# Altium PCB DAQ_REV_B.PcbDoc (part 2 of 2)
Units mil, origin at the board's own origin, x right, y up, seen from the top; angles counter-clockwise.
Board outline 2228.79 x 3254.41 mil, 2 copper layers (Top Layer, Bottom Layer), stack 63.824 mil thick; 159 components, 100 nets, 487 pads, 285 vias.
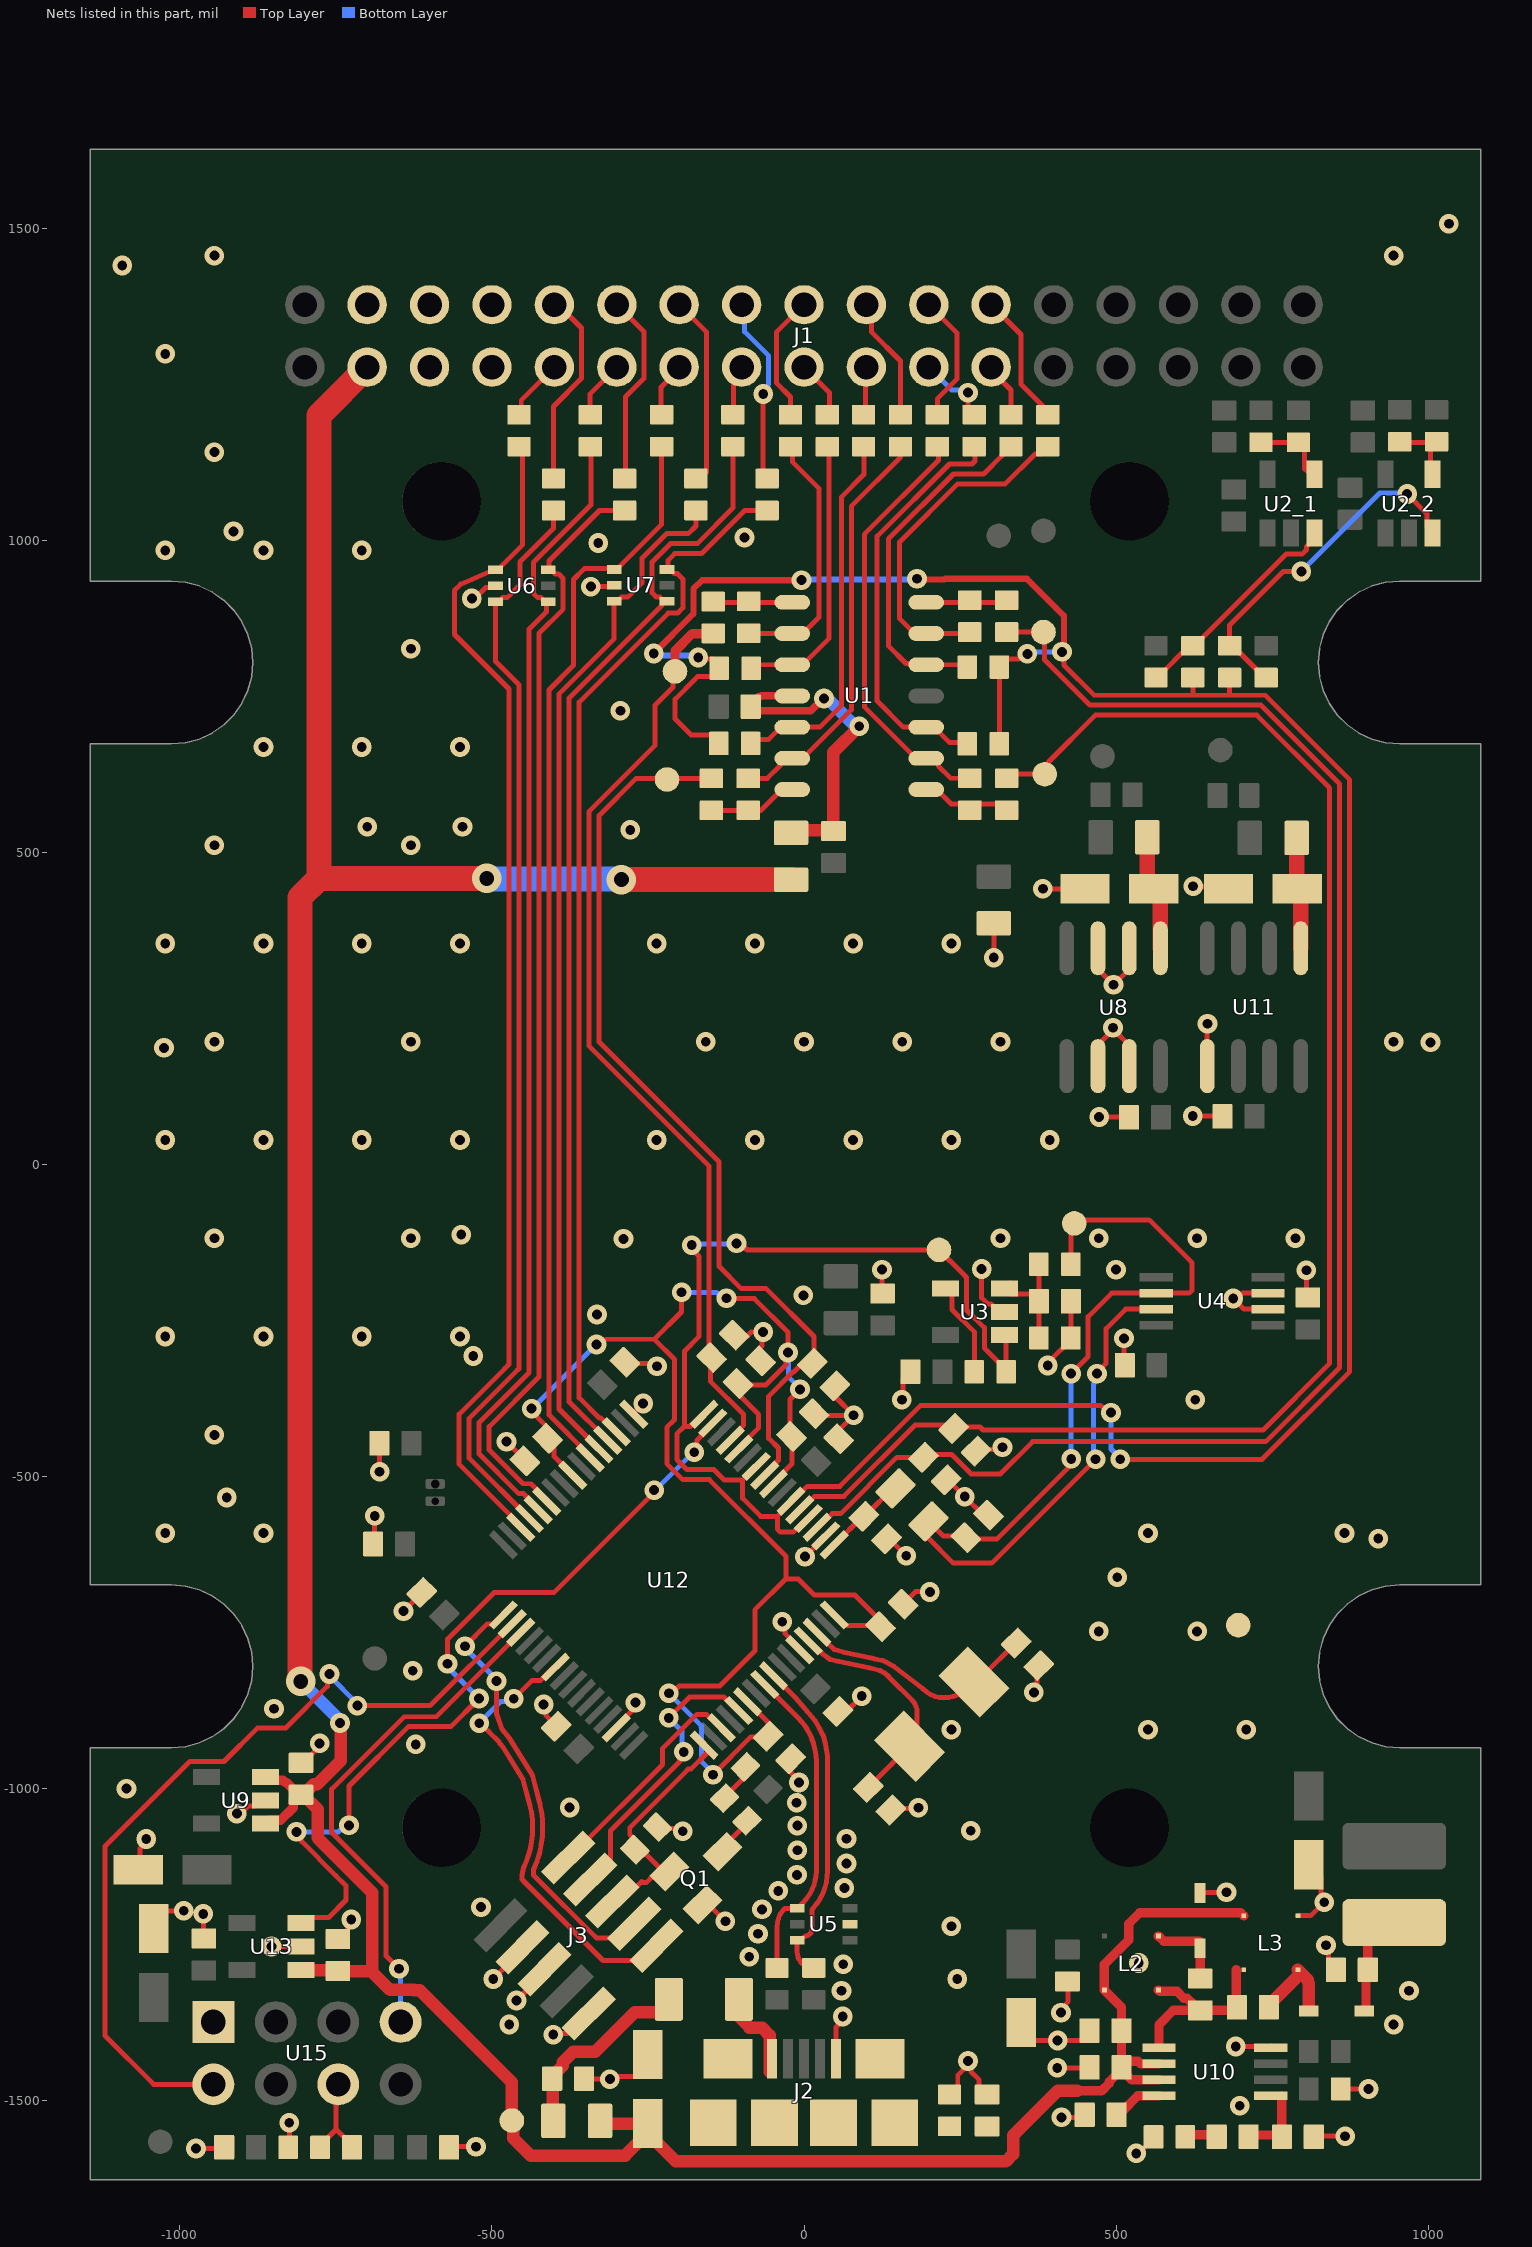
[diagram p2: the nets of this part, all layers, seen from the top]

## Via types
v1: diameter 31.5, hole 15.75, Top Layer to Bottom Layer, 242 vias
v2: diameter 31.5, hole 15.75, Top Layer to Bottom Layer, tented both sides, 40 vias
v3: diameter 47.24, hole 23.62, Top Layer to Bottom Layer, 3 vias

## Nets (pads, with @x,y where several pads share a name; then routed paths per layer and width w, separated by ;. In a path a pad name is that pad's centre, name@x,y a point inside that pad or via, vN(x,y) a via of type N, cw(c..) or ccw(c..) an arc to the next point about the centre after c; other vN are vias at no path point) (continued)
GND: C4.2 C5.2 C6.2 C7.2 C8.1 C9.2 C10.2 C11.2 C12.2 C13.1 C14.2 C15.1 C16.2 C18.2 C19.1 C20.2 C21.2 C24.2 C25.2 C26.2 C27.2 C28.2 C29.2 C31.2 C32.2 C33.1 C35.2 C36.2 C37.2 C38.2 C39.2 C40.2 C41.2 C42.2 C44.2 C45.2 C46.2 C47.2 C48.2 C49.2 C50.2 C51.2 C52.2 C53.2 C54.1 C55.1 C57.2 D2.2 FB4.1 J1.4 J1.5 J1.6 J1.7 J1.8 J2.5 J3.3 J3.5 J3.9 L3.4 Q1.2 R31.1 R42.1 R44.1 R45.1 R52.1 R54.1 TP14.1 U3.2 U4.2 U4.3 U6.2 U7.2 U8.2 U8.3 U8.6 U8.7 U9.2 U10.4 U11.5 U12.2 U12.17 U12.46 U12.60 U13.2 U15.1 | length 4146.4
  Top Layer w8: C27.2@-1099.14,-1137.13 -1090.81,-1137.13 -1063.98,-1110.3 -1063.98,-1096.25 -1054.13,-1086.41 v1(-1054.13,-1080.71) ; C39.2@-1045.28,-1193.9 -1043.31,-1195.87 v1(-994.09,-1195.87) ; v1(-974.41,-1576.77) -931.1,-1576.77 C55.1@-929.13,-1574.8 ; v1(-962.6,-1200.79) -962.6,-1239.17 C41.2@-961.61,-1240.16 ; v2(-908.78,-1040.04) -902.42,-1040.04 -889.88,-1027.5 -880.84,-1027.5 -872.05,-1018.7 U9.2@-854.33,-1018.7 ; v2(-853.35,-1252.95) U13.2@-806.1,-1252.95 ; R52.1@-826.77,-1574.8 -824.8,-1572.84 v1(-824.8,-1535.43) ; C28.2@-799.51,-955.61 -776.27,-932.37 v1(-776.27,-927.47) ; C40.2@-747.05,-1241.14 -743.5,-1241.14 -731.36,-1229 -731.36,-1221.69 -725.68,-1216 v1(-725.68,-1209.65) ; C51.2@-690.47,-608.01 -687.99,-605.53 v2(-687.99,-562.99) ; C52.2@-680.4,-446.55 -680.12,-446.83 v2(-680.12,-492.13) ; v1(-641.73,-715.55) -612.58,-686.4 C35.2@-612.58,-685.64 ; C54.1@-568.9,-1574.8 -567.91,-1573.82 v1(-525.59,-1573.82) ; v1(-532.29,907.29) -527.7,907.29 -510.37,924.61 -502.31,924.61 -499.42,927.5 U6.2@-494.5,927.5 ; v1(-498.03,-1305.12) -441.92,-1249.01 J3.3@-441.16,-1249.01 ; v1(-476.78,-443.9) -447.23,-473.45 C48.2@-447.23,-474.79 ; v1(-460.63,-1339.57) -405.81,-1284.74 J3.5@-405.81,-1284.36 ; v1(-417.32,-865.16) -413.23,-869.25 -413.23,-883.04 -397.03,-899.25 C36.2@-397.03,-900.21 ; v1(-401.97,-1394.29) -399.76,-1392.09 -379.18,-1392.09 J3.9@-338.63,-1351.54 ; C57.2@-351.38,-1456.77 -342.6,-1465.55 v1(-311.02,-1465.55) -307.01,-1461.54 -270.25,-1461.54 -250.63,-1441.91 C21.2@-250.63,-1426.17 ; v1(-341.5,926.22) -306.06,926.22 U7.2@-304.13,928.15 ; U12.46@-300.75,-902.68 -300.75,-900.16 -274.59,-874 -274.59,-866.69 v2(-270.09,-862.2) ; C38.2@-287.02,-316.55 -284.52,-319.06 -239.88,-319.06 v1(-235.68,-323.26) ; U12.17@-272.91,-400.19 -272.91,-397.91 v2(-257.87,-382.87) ; R54.1@-230.49,-1063.72 -205.25,-1063.72 -200.69,-1068.28 v1(-194.33,-1068.28) ; Q1.2@-159.7,-1186.75 -151.83,-1186.75 v1(-125.98,-1212.6) ; C5.2@-111.83,-273.24 -109.32,-275.75 -92.15,-275.75 -84.68,-268.28 -65.52,-268.28 v1(-65.45,-268.21) ; C44.2@-69.5,-314.58 -72.01,-312.08 -72.01,-294.91 -67,-289.9 -67,-273.16 v1@-63.75,-269.91 ; v2(-34.79,-732.69) -30.3,-737.18 -30.3,-751.64 -7.05,-774.89 U12.60@-7.05,-777.41 ; C46.2@-21.28,-952.15 -23.78,-954.66 -23.78,-971.83 -8.06,-987.54 v1(-8.06,-990.1) ; v2(1.55,-628.23) U12.2@34.71,-595.06 ; C47.2@16.13,-399.23 18.63,-401.73 v1(79.57,-401.73) ; C7.2@49.59,-371.76 v1(79.57,-401.73) ; J2.5@51.18,-1433.07 51.18,-1382.34 62.01,-1371.52 v1(62.01,-1365.16) ; C37.2@54.51,-876.36 68.06,-876.36 v1(92.62,-851.8) ; C42.2@55.5,-439.58 55.5,-425.8 v1(79.57,-401.73) ; v1(125,-168.31) 125,-205.71 C26.2@125.98,-206.69 ; C53.2@132.27,-599.79 136.71,-599.79 v1(163.77,-626.84) ; C50.2@139.22,-1034.34 156.39,-1034.34 158.9,-1031.83 182.3,-1031.83 v1(183.34,-1030.79) ; v1(156.82,-376.79) 158.41,-375.2 158.41,-344.13 C8.1@170.52,-332.02 ; C45.2@158.84,-704.35 178.74,-684.45 201.18,-684.45 v1(201.77,-685.04) ; C6.2@229.71,-503.33 229.71,-504.18 v1(257.62,-532.08) 287.16,-561.63 C12.2@295.65,-561.63 ; R42.1@233.27,-1490.16 234.64,-1490.16 246.39,-1478.41 246.39,-1459.34 262.8,-1442.94 v1(262.8,-1436.58) 267.29,-1441.08 267.29,-1453.31 280.79,-1466.82 280.79,-1478.02 C13.1@292.94,-1490.16 ; C4.2@275.97,-459.04 278.47,-456.53 314.49,-456.53 v1(318.06,-452.96) ; v2(284.66,-167.3) 284.66,-213.39 294.63,-223.35 299.79,-223.35 312.39,-235.96 U3.2@321.25,-235.96 ; C13.1@290.97,-1500 C13.1@291.34,-1500 ; v1(304.13,331.69) FB4.1@304.13,386.81 ; C19.1@348.43,-1375 348.43,-1383.92 368.05,-1403.54 v1(406.5,-1403.54) C20.2@454.72,-1403.54 ; v1(368.38,-845.75) 368.38,-839.39 373.74,-834.03 373.74,-805.37 C49.2@376.25,-802.86 ; v1(382.87,441.93) C16.2@439.05,441.93 ; v1(390.75,-321.85) 390.75,-317.73 428.15,-280.33 428.15,-219.44 C9.2@427.59,-218.88 ; v1(405.86,-1447.49) 457.04,-1447.49 C15.1@457.68,-1446.85 ; v1(411.92,-1359.01) 411.92,-1352.65 423.23,-1341.35 423.23,-1309.96 C18.2@422.24,-1308.98 ; v1(412.64,-1526.82) 445.62,-1526.82 C29.2@449.8,-1522.64 ; U8.6@471.14,157.72 471.14,192.26 495.06,216.18 v2@495.06,217.26 ; U8.3@471.14,346.69 471.14,313.13 v2(496.04,288.23) v2@496.04,288.13 ; v1(472.93,76.2) 520.18,76.2 C14.2@520.67,75.71 ; v2(495.06,219.23) v2@495.06,217.26 ; v2@496.04,286.16 v2@496.04,288.13 ; v1(512.8,-278.54) 512.8,-319.84 C11.2@514.2,-321.24 ; U8.7@521.14,157.72 521.14,191.18 v2@495.06,217.26 ; U8.2@521.14,346.69 521.14,313.23 v2@496.04,288.13 ; v1(532.42,-1584.58) 536.48,-1584.58 560.04,-1561.02 R45.1@560.04,-1558.07 ; v1(622.91,77.8) 670.16,77.8 C32.2@670.65,77.31 ; v1(623.63,445.94) C33.1@671.42,445.94 ; D2.2@634.84,-1167.32 636.02,-1166.14 v1(677.17,-1166.14) ; U11.5@645.65,155.26 646.09,155.7 646.09,225.19 v2(646.54,225.63) ; v2(691.93,-1413.39) 692.42,-1412.89 747.54,-1412.89 U10.4@748.03,-1412.4 ; U4.2@743.53,-231.68 705.1,-231.68 v2(687.99,-214.57) 694.35,-214.57 702.83,-206.09 U4.3@743.53,-206.09 ; L3.4@791.34,-1203.74 812.01,-1203.74 v1(833.66,-1182.09) 833.66,-1175.73 828.68,-1170.74 828.68,-1141.67 C24.2@809.05,-1122.05 ; v1(805.12,-169.29) 805.12,-210.59 C10.2@807.51,-212.98 ; C31.2@816.93,-1558.07 817.91,-1557.09 v1(867.13,-1557.09) ; v1(836.61,-1250.98) 840.22,-1254.59 840.22,-1274.67 852.36,-1286.81 C25.2@852.36,-1290.35 ; R44.1@859.25,-1481.3 v1(904.53,-1481.3)
  other v1: -472.44,-1377.95 944.88,-1377.95 60.04,-1323.82 969.49,-1323.82 245.45,-1305.22 62.99,-1281.5 -87.76,-1269.35 -73.61,-1232.48 236.22,-1220.47 -67.39,-1193.47 -41.29,-1163.84 64.7,-1159.32 -11.21,-1138.23 67.98,-1119.96 -10.61,-1098.74 67.98,-1080.46 267.22,-1067.42 -10.61,-1059.25 -375.59,-1030.25 -11.81,-1022.64 -1085.63,-1000 551.18,-905.51 708.66,-905.51 -849.41,-872.05 -626.97,-811.02 472.44,-748.03 629.92,-748.03 501.97,-661.42 920.28,-599.41 -1023.62,-590.55 -866.14,-590.55 551.18,-590.55 866.14,-590.55 -925.2,-533.46 -944.88,-433.07 626.97,-376.97 -530.08,-306.61 -1023.62,-275.59 -866.14,-275.59 -708.66,-275.59 -551.18,-275.59 -331.69,-240.16 -0.98,-209.65 500,-168.31 -289.37,-119.09 -944.88,-118.11 -629.92,-118.11 314.96,-118.11 472.44,-118.11 629.92,-118.11 787.4,-118.11 -549.21,-112.2 -1023.62,39.37 -866.14,39.37 -708.66,39.37 -551.18,39.37 -236.22,39.37 -78.74,39.37 78.74,39.37 236.22,39.37 393.7,39.37 -1025.59,187.01 1003.94,195.87 -944.88,196.85 -629.92,196.85 -157.48,196.85 0,196.85 157.48,196.85 314.96,196.85 944.88,196.85 -1023.62,354.33 -866.14,354.33 -708.66,354.33 -551.18,354.33 -236.22,354.33 -78.74,354.33 78.74,354.33 236.22,354.33 -944.88,511.81 -629.92,511.81 -278.54,536.42 -699.8,541.34 -547.24,541.34 -866.14,669.29 -708.66,669.29 -551.18,669.29 -294.29,727.36 -629.92,826.77 -1023.62,984.25 -866.14,984.25 -708.66,984.25 -329.72,996.06 -95.47,1004.92 -914.37,1014.76 -944.88,1141.73 -1023.62,1299.21 -1092.52,1440.94 -944.88,1456.69 944.88,1456.69 1033.46,1507.87
  other v2: 698.33,-1508.37 536.42,-1279.53 -517.72,-1189.96 -622.05,-929.13 236.22,-905.51
IN1_N: J1.23 R19.1 | length 89.3
  Top Layer w8: J1.23@300,1277.95 300,1272.97 331.69,1241.28 R19.1@331.69,1201.77
IN1_P: J1.24 R15.1 | length 219.2
  Top Layer w8: J1.24@300,1377.95 347.71,1330.24 347.71,1250.71 396.65,1201.77 R15.1@399.61,1201.77
IN2_N: J1.21 R4.1 | length 119.1
  Top Layer w8: v1(262.77,1237.14) 262.77,1211.64 R4.1@272.64,1201.77
  Bottom Layer w8: J1.21@200,1277.95 236.32,1241.63 258.27,1241.63 v1(262.77,1237.14)
IN2_P: J1.22 R2.1 | length 208.2
  Top Layer w8: J1.22@200,1377.95 245.5,1332.46 245.5,1259.11 213.58,1227.2 R2.1@213.58,1201.77
IN3_N: J1.19 R24.1 | length 82.7
  Top Layer w8: R24.1@98.43,1195.87 98.43,1276.38 J1.19@100,1277.95
IN3_P: J1.20 R21.1 | length 198.8
  Top Layer w8: J1.20@100,1377.95 107.84,1370.12 107.84,1334.46 154.53,1287.77 R21.1@154.53,1201.77
IN4_N: J1.17 R10.1 | length 95.1
  Top Layer w8: J1.17@0,1277.95 40.53,1237.42 R10.1@40.53,1199.63
IN4_P: J1.18 R7.1 | length 203.9
  Top Layer w8: R7.1@-21.65,1201.77 -21.65,1230.24 -44.29,1252.88 -44.29,1333.66 J1.18@0,1377.95
JTAG_RST: J3.10 U12.39 | length 715.7
  Top Layer w8: v1(-520.56,-895.18) -505.07,-908.63 -488.81,-924.89 -486.99,-928.23 cw(c-634.13,-1062.76) -482.25,-933.6 -450.71,-984.62 -439.89,-1024.39 cw(c-580.75,-1062.76) -434.76,-1062.76 cw(c-580.75,-1062.76) -449.58,-1126.86 -451.77,-1139.05 -451.77,-1145.68 -449.43,-1148.02 -321.99,-1275.46 -273.88,-1275.46 J3.10@-236.45,-1251.74 ; v1(-465.06,-855.86) -436.19,-826.99 -422.45,-826.99 -400.7,-805.24 U12.39@-398.18,-805.24
  Bottom Layer w8: v1(-520.56,-895.18) -520.56,-894.75 -486.17,-860.36 -469.56,-860.36 v1(-465.06,-855.86)
JTAG_TCK: J3.4 U12.53 | length 453.5
  Top Layer w8: J3.4@-333.43,-1136.74 -310.32,-1113.63 -310.32,-1067.95 -199.79,-957.42 -199.79,-954.46 -192.83,-947.5 v2(-192.83,-941.14) ; v2(-216.83,-886.66) -183.27,-853.1 -128.74,-853.1 -107,-874.84 U12.53@-104.48,-874.84
  Bottom Layer w8: v2(-216.83,-886.66) -195.8,-907.69 -195.8,-938.17 v2(-192.83,-941.14)
JTAG_TDI: J3.8 U12.33 | length 704.3
  Top Layer w8: v1(-543.29,-771.92) -507.37,-736 -500.75,-736 -499.71,-737.04 -484.39,-721.73 U12.33@-481.7,-721.73 ; v1(-492.81,-827.76) -492.81,-878.32 -492.81,-879.33 -483.47,-905.73 -472.84,-918.23 -472.48,-918.95 -436.39,-976.31 -434.71,-980.07 -423.89,-1022.23 -423.44,-1024.08 cw(c-580.75,-1062.76) -418.76,-1062.7 cw(c-434.76,-1062.76) -418.76,-1062.76 cw(c-580.75,-1062.76) -433.41,-1130.09 -433.58,-1130.49 -433.58,-1138.39 -431.24,-1140.73 -335.24,-1236.73 -334.94,-1236.73 -332.26,-1239.41 -294.69,-1239.41 J3.8@-271.58,-1216.31
  Bottom Layer w8: v1(-543.29,-771.92) -543.29,-774.6 -492.81,-825.08 v1(-492.81,-827.76)
JTAG_TDO: J3.6 Q1.1 R54.2 U12.49 | length 396.2
  Top Layer w8: J3.6@-298.08,-1172.09 -283.13,-1172.09 -260.03,-1148.99 -258.86,-1150.15 -252.23,-1150.15 -242.07,-1139.99 -222.67,-1139.99 Q1.1@-215.71,-1133.03 ; R54.2@-274.67,-1093.41 -273.35,-1092.09 -273.35,-1079.33 -279.25,-1073.43 -279.25,-1062.6 -185.53,-968.89 -181.34,-968.89 -152.91,-940.46 -152.91,-937.77 U12.49@-160.16,-930.52 ; R54.2@-273.92,-1092.66 R54.2@-267.94,-1098.65 ; R54.2@-266.79,-1101.28 -265.71,-1102.36 -255.91,-1102.36 -224.41,-1133.86 Q1.1@-215.71,-1133.86
JTAG_TMS: J3.2 U12.51 | length 352
  Top Layer w8: J3.2@-368.79,-1101.38 -366.38,-1101.38 -226.62,-961.62 -226.62,-955.96 -226.43,-955.77 -226.43,-935.5 -171.87,-880.94 -156.58,-880.94 -150.24,-887.28 -147.72,-887.28 U12.51@-132.32,-902.68
NetC9_1: C9.1 R30.1 R31.2 U3.3 | length 194.1
  Top Layer w8: U3.3@330.05,-189.76 U3.3@321.25,-198.56 330.05,-207.35 364.88,-207.35 C9.1@376.41,-218.88 ; R31.2@376.41,-277.94 C9.1@376.41,-218.88 ; R30.1@376.41,-159.83 C9.1@376.41,-218.88
NetC16_1: C16.1 FB5.1 U8.1 | length 191.4
  Top Layer w15: C16.1@550.2,443.62 C16.1@551.65,442.17
  Top Layer w25: C16.1@550.2,443.62 FB5.1@550.2,524.53 ; C16.1@551.65,442.17 560.02,442.17 571.14,431.04 U8.1@571.14,346.69
NetC22_2: C22.2 D2.1 L2.3 | length 129.1
  Top Layer w15: L2.3@567.91,-1236.22 576.4,-1244.7 633.48,-1244.7 634.84,-1246.06 C22.2@634.84,-1304.13
NetC23_2: C23.2 D1.1 L3.3 | length 145
  Top Layer w20: C23.2@745.08,-1350.39 745.08,-1346.85 794.68,-1297.24 ; L3.3@791.34,-1290.35 807.66,-1306.68 807.66,-1310.22 809.06,-1311.61 D1.1@809.06,-1354.33
NetC25_1: C25.1 D1.2 L5.1 | length 169.7
  Top Layer w15: D1.2@897.64,-1356.3 899.23,-1356.3 900.59,-1354.94 900.59,-1293.31 C25.1@903.54,-1290.35 903.54,-1244.69 933.47,-1214.76 L5.1@945.87,-1214.76
NetC29_1: C29.1 U10.8 | length 74.3
  Top Layer w15: C29.1@508.86,-1521.65 508.86,-1518.11 534.84,-1492.13 U10.8@568.9,-1492.13
NetC30_1: C30.1 C31.1 U10.1 | length 115.2
  Top Layer w15: C30.1@712.6,-1555.12 765.75,-1555.12 U10.1@765.75,-1493.11
NetC30_2: C30.2 R45.2 | length 52.6
  Top Layer w15: R45.2@609.25,-1554.13 609.74,-1554.63 660.92,-1554.63 C30.2@661.42,-1555.12
NetC33_2: C33.2 FB6.1 U11.1 | length 177.6
  Top Layer w25: FB6.1@789.37,523.54 789.37,444.02 C33.2@791.22,442.17 ; U11.1@796.14,346.7 C33.2@796.14,442.17
NetC44_1: C44.1 C45.1 C46.1 C47.1 C48.1 U12.8 U12.12 U12.24 U12.54 U12.64 | length 2589.3
  Top Layer w8: v1(-436.46,-391.06) -436.46,-395.94 -400.26,-432.14 -400.26,-467.71 U12.24@-370.35,-497.63 U12.24@-369.82,-497.63 ; v1(-332.49,-288.31) -326.13,-288.31 -317.71,-279.89 -239.81,-279.89 ; v2(-216.58,-847.16) -211.67,-847.16 -200.14,-835.63 -134.84,-835.63 -78.74,-779.53 -78.74,-713.59 -28.78,-663.63 -28.78,-627.72 -151.6,-504.9 -194.1,-504.9 -219.73,-479.27 -219.73,-421.03 -207.3,-408.61 -207.3,-312.39 -239.81,-279.89 ; v1(-196.18,-204.63) -196.18,-236.25 -239.81,-279.89 ; v1(-145.75,-977.91) -145.75,-977.8 -85.09,-917.14 -78.47,-917.14 -77.14,-918.47 -74.64,-915.96 C46.1@-57.47,-915.96 ; v1(-124.27,-214.2) -123.59,-214.88 -79.54,-214.88 -25.59,-268.83 v1(-25.59,-301.1) -28.93,-304.44 -28.93,-321 -61.22,-353.28 -103.19,-353.28 C44.1@-105.69,-350.77 ; C44.1@-109.63,-363.67 -72.73,-400.57 -72.73,-421.59 -104.48,-453.35 U12.12@-104.48,-455.87 ; U12.54@-90.56,-858.41 U12.54@-90.56,-860.92 -57.47,-894.02 -57.47,-900.67 -54.96,-903.17 C46.1@-54.96,-915.96 ; U12.8@-48.81,-511.54 -48.81,-509.03 -19.15,-479.37 -19.15,-446.08 -22.57,-442.66 -22.57,-376.56 v1(-6.29,-360.22) v1(-6.29,-360.22) ; -26.21,-664.27 -8.83,-664.27 16.86,-689.96 81.82,-689.96 C45.1@127.52,-735.66 ; U12.64@48.63,-721.73 63.94,-737.04 66.64,-737.04 68.01,-738.41 102.6,-738.41 102.98,-738.03 103.35,-738.41 C45.1@118.88,-738.41
  Bottom Layer w8: v1(-436.46,-391.06) -435.85,-391.06 -333.1,-288.31 v1(-332.49,-288.31) ; v2(-216.58,-847.16) -164.49,-899.25 -164.49,-956.19 -145.75,-974.93 v1(-145.75,-977.91) ; v1(-196.18,-204.63) -140.19,-204.63 -130.63,-214.2 v1(-124.27,-214.2) ; v1@-25.14,-300.65 -25.14,-339.83 -6.29,-358.68 v1(-6.29,-360.22)
NetC49_1: C49.1 U12.62 Y2.1 | length 499.2
  Top Layer w8: U12.62@20.79,-749.57 37.45,-766.23 48,-776.77 65.16,-781.67 107.7,-790.9 107.94,-790.9 113.94,-792.25 125.95,-795.06 128.06,-795.89 130.69,-796.94 139.1,-801.6 145.03,-805.01 188.98,-838.58 190.81,-840.42 ccw(c224.41,-806.81) 224.41,-854.33 ; Y2.1@272.24,-829.12 295.3,-810.51 328.51,-777.31 C49.1@340.06,-766.67 ; 224.41,-854.33 ccw(c224.41,-799.73) Y2.1@263.02,-838.34 ; 224.41,-854.33 ccw(c224.41,-799.73) Y2.1@263.02,-838.34 ; 224.41,-854.33 ccw(c224.41,-799.73) Y2.1@263.02,-838.34 ; 224.41,-854.33 ccw(c224.41,-799.73) Y2.1@263.02,-838.34
NetC50_1: C50.1 U12.61 Y2.2 | length 466.2
  Top Layer w8: U12.61@6.87,-763.49 24.79,-778.89 31.13,-785.23 41.37,-792.77 52.43,-795.28 105.98,-806.9 119.91,-810.35 122.2,-811.06 129.63,-814.76 cw(c-919.92,-1884.02) 139.53,-824.57 173.23,-858.27 cw(c154.22,-877.28) 181.1,-877.28 Y2.2@181.1,-903.47 ; C50.1@103.03,-998.15 114.18,-987.12 148.37,-952.93 Y2.2@169.24,-932.12 ; Y2.2@169.24,-932.12 ccw(c140.59,-903.47) Y2.2@181.1,-903.47 ; Y2.2@169.24,-932.12 ccw(c140.59,-903.47) Y2.2@181.1,-903.47 ; Y2.2@169.24,-932.12 ccw(c140.59,-903.47) Y2.2@181.1,-903.47 ; Y2.2@169.24,-932.12 ccw(c140.59,-903.47) Y2.2@181.1,-903.47
NetC53_1: C53.1 FB2.1 U12.1 | length 137.3
  Top Layer w8: U12.1@48.63,-608.98 95.37,-562.24 97.67,-562.24 98.44,-562.24 143.85,-516.83 FB2.1@147.73,-516.83
NetC56_1: C56.1 R52.2 U15.6 | length 152.6
  Top Layer w8: R52.2@-775.59,-1574.8 -775.59,-1571.85 -750,-1546.26 -750,-1545.67 ; U15.6@-746.46,-1474.02 -750,-1477.56 -750,-1545.67 ; C56.1@-724.41,-1574.8 -724.41,-1571.26 -750,-1545.67
NetC57_1: C57.1 F1.2 FB1.1 | length 315
  Top Layer w20: C57.1@-403.54,-1464.65 -402.56,-1465.63 -402.56,-1531.5 FB1.1@-401.58,-1532.48 ; C57.1@-403.54,-1461.1 -386.51,-1444.06 -386.51,-1438.45 -370.07,-1422.01 -364.45,-1422.01 -364.4,-1421.96 -334.87,-1421.96 -271.57,-1358.65 -229.17,-1358.65 -216.54,-1346.01 F1.2@-216.54,-1337.6
NetD3_1: D3.1 R53.2 | length 62.4
  Top Layer w8: R53.2@-134.84,-1023.62 R53.2@-134.84,-1019.31 ; R53.2@-125.69,-1012.12 D3.1@-87.68,-974.11 ; D3.1@-94.87,-982.28 D3.1@-94.87,-977.97
NetJ1_9: J1.9 R32.2 | length 99.7
  Top Layer w8: R32.2@-456.69,1201.77 -453.12,1205.35 -453.12,1224.83 J1.9@-400,1277.95
NetJ1_10: J1.10 R33.1 | length 318.9
  Top Layer w8: R33.1@-401.51,1099.41 -401.51,1214.93 -356.5,1259.94 -356.5,1340.76 -393.7,1377.95 J1.10@-400,1377.95
NetJ1_11: J1.11 R34.2 | length 92.9
  Top Layer w8: R34.2@-342.8,1202.76 -342.8,1235.15 J1.11@-300,1277.95
NetJ1_12: J1.12 R35.1 | length 308.9
  Top Layer w8: J1.12@-300,1377.95 -256.5,1334.46 -256.5,1259.94 -286.42,1230.02 R35.1@-286.42,1099.41
NetJ1_13: J1.13 R36.2 | length 87.3
  Top Layer w8: R36.2@-229.3,1202.76 -229.3,1245.74 -200,1275.04 J1.13@-200,1277.95
NetJ1_14: J1.14 R37.1 | length 305.4
  Top Layer w8: J1.14@-200,1377.95 -156.5,1334.46 -156.5,1109.19 -168.25,1097.44 R37.1@-170.28,1097.44
NetJ1_15: J1.15 R38.2 | length 80.6
  Top Layer w8: R38.2@-113.09,1202.76 -113.09,1249.98 -100,1263.07 J1.15@-100,1277.95
NetJ1_16: J1.16 R39.1 | length 312.7
  Top Layer w8: v1(-65.41,1234.88) -65.41,1095.92 R39.1@-59.06,1089.57
  Bottom Layer w8: J1.16@-100,1377.95 -94.99,1372.94 -94.99,1334.46 -56.5,1295.97 -56.5,1250.14 -65.41,1241.23 v1(-65.41,1234.88)
NetQ1_3: Q1.3 R53.1 | length 65.5
  Top Layer w8: Q1.3@-137.99,-1109.19 -137.99,-1102.1 R53.1@-96.68,-1060.8
NetR1_1: R1.1 R2.2 U1.9 | length 691.9
  Top Layer w8: R2.2@228.43,1150.59 227.31,1150.59 215.57,1138.84 215.57,1128.95 96.59,1009.98 96.59,733.5 179.07,651.02 U1.9@195.8,651.02 208.31,651.02 215.52,643.81 215.52,638.59 234.98,619.13 R1.1@265.68,619.13
NetR1_2: R1.2 R3.1 U1.8 | length 142.6
  Top Layer w8: U1.8@195.8,601.02 212.53,601.02 235.43,578.12 265.68,578.12 314.56,578.12 R3.1@324.74,567.95
NetR4_2: R4.2 R6.2 U1.10 | length 663.8
  Top Layer w8: U1.10@195.8,701.02 159.21,701.02 117.26,742.98 117.26,1007.03 233.07,1122.84 269.36,1122.84 274.05,1127.53 274.05,1139.15 R4.2@285.49,1150.59 ; U1.10@208.57,701.02 233.38,676.22 R6.2@267.65,676.22
NetR5_1: R5.1 R7.2 U1.2 | length 413.1
  Top Layer w8: R5.1@-88.65,844.53 R5.1@-84.12,849.05 ; R5.1@-88.65,851.42 -89.04,851.02 -84.12,851.02 U1.2@-18.77,851.02 -2.03,851.02 23.78,876.83 23.78,1083.66 -18.17,1125.61 -18.17,1138.84 R7.2@-15.86,1141.15
NetR5_2: R5.2 R9.1 U1.1 | length 129.6
  Top Layer w8: R9.1@-147.7,902.6 -146.13,901.02 -88.65,901.02 U1.1@-18.77,901.02
NetR8_1_1: R8_1.1 R11_1.2 U2_1.3 | length 358.5
  Top Layer w8: R8_1.1@563.98,780.51 566.93,780.51 578.68,792.26 578.68,793.16 605.46,819.95 608.33,819.95 623.03,834.65 628.94,834.65 637.73,843.44 772.45,978.16 798.28,978.16 805.31,985.19 805.31,990.35 817.91,1002.95 U2_1.3@817.91,1011.81
NetR8_2_1: R8_2.1 R11_2.2 U2_2.3 | length 561.6
  Top Layer w8: R8_2.1@740.65,785.35 732.85,785.35 725.95,792.26 725.95,792.67 698.68,819.95 696.79,819.95 682.09,834.65 682.09,864.73 767.77,950.41 v1(797,950.41) ; v2(966.48,1074.78) 998.09,1043.17 998.09,1020.61 U2_2.3@1006.89,1011.81
  Bottom Layer w8: v1(797,950.41) 922.77,1076.18 965.08,1076.18 v2(966.48,1074.78)
NetR10_2: R10.2 R13.2 U1.3 | length 453.7
  Top Layer w8: R13.2@-91.6,801.02 U1.3@-18.77,801.02 -2.03,801.02 39.78,842.83 R10.2@39.78,1147.82
NetR12_1: R12.1 R15.2 U1.13 | length 546.6
  Top Layer w8: R12.1@265.68,853.38 263.32,851.02 U1.13@195.8,851.02 192.81,854.01 174.09,854.01 153.26,874.84 153.26,997.78 246.32,1090.84 322.44,1090.84 370.44,1138.84 379.98,1138.84 R15.2@390.75,1149.61
NetR12_2: R12.2 R16.1 U1.14 | length 130.4
  Top Layer w8: U1.14@195.8,901.02 321.19,901.02 R16.1@324.74,904.57
NetR14_1_2: R14_1.2 R17_1.2 U2_1.4 | length 123.6
  Top Layer w8: R17_1.2@725.39,1157.48 785.43,1157.48 788.39,1157.48 802.23,1143.64 802.23,1115.09 U2_1.4@811.02,1106.3
NetR14_2_2: R14_2.2 R17_2.2 U2_2.4 | length 112.4
  Top Layer w8: R17_2.2@943.9,1157.48 1003.94,1157.48 1003.94,1109.25 U2_2.4@1006.89,1106.3
NetR18_1: R18.1 R21.2 U1.6 | length 658
  Top Layer w8: R18.1@-89.36,618.88 -58.66,618.88 -38.49,639.05 -38.49,643.81 -31.27,651.02 U1.6@-18.77,651.02 ; U1.6@-2.03,651.02 75.78,728.83 75.78,1055 154.53,1133.75 R21.2@154.53,1150.59 R21.2@154.53,1157.48
NetR18_2: R18.2 R22.1 U1.7 | length 143.5
  Top Layer w8: R22.1@-148.42,567.7 R18.2@-89.36,567.7 -68.82,567.7 -35.5,601.02 U1.7@-18.77,601.02
NetR19_2: R19.2 R20.2 U1.12 | length 571.2
  Top Layer w8: R20.2@261.75,797.28 258.01,801.02 U1.12@195.8,801.02 193.75,803.08 163.45,803.08 135.26,831.27 135.26,1002.41 239.7,1106.84 287.94,1106.84 316.99,1135.89 316.99,1138.84 328.74,1150.59 R19.2@331.69,1150.59
NetR24_2: R24.2 R26.2 U1.5 | length 600.6
  Top Layer w8: R26.2@-85.42,674.98 -79.52,680.89 -57.18,680.89 -37.05,701.02 U1.5@-18.77,701.02 25.34,701.02 59.78,735.46 59.78,1069.62 95.95,1105.79 95.95,1138.84 99.75,1142.65 R24.2@106.36,1142.65
NetR28_1: R28.1 U3.4 | length 153.4
  Top Layer w8: U3.4@226.76,-198.56 228.24,-198.56 237.03,-207.35 237.03,-232.21 272.88,-268.06 R28.1@272.88,-332.02
OUT1_P: C6.1 R16.2 TP4.1 U12.3 | length 2564.6
  Top Layer w8: U12.3@20.79,-581.14 23.31,-581.14 45.05,-559.4 58.71,-559.4 148.87,-469.24 173.44,-469.24 173.84,-469.65 176.35,-467.14 193.52,-467.14 196.02,-464.63 236.75,-464.63 267.82,-495.71 314.56,-495.71 366.37,-443.9 739.74,-443.9 858.52,-325.12 858.52,609.97 732.35,736.14 458.3,736.14 385.76,808.68 385.76,818.96 385.76,851.41 TP4.1@383.79,853.38 R16.2@324.74,853.38
OUT2_P: C4.1 R3.2 TP1.1 U12.5 | length 2488.9
  Top Layer w8: U12.5@-7.05,-553.3 -4.53,-553.3 17.21,-531.56 63.92,-531.56 177.91,-417.57 C4.1@239.33,-417.57 ; C4.1@239.78,-422.85 242.28,-420.35 282.08,-420.35 286.95,-425.22 735.79,-425.22 842.52,-318.49 842.52,603.35 ; R3.2@324.74,619.13 331.29,625.69 TP1.1@385.76,625.69 391.76,631.69 391.76,645.05 466.85,720.14 725.72,720.14 841.54,604.33
OUT3_P: C7.1 R22.2 TP5.1 U12.9 | length 1483
  Top Layer w8: R22.2@-148.42,618.88 -268.93,618.88 -328.24,559.57 -328.24,196.34 -136.02,4.12 -136.02,-163.21 -100.35,-198.88 -60.73,-198.88 15.91,-275.51 15.91,-316.01 C7.1@13.4,-318.52 -2.49,-318.52 -16.44,-332.47 -17.78,-332.47 -56.73,-371.42 -56.73,-438.55 -40.98,-454.3 -40.98,-473.37 -62.73,-495.11 U12.9@-62.73,-497.63
OUT4_P: C5.1 R9.2 TP2.1 U12.13 | length 1503.7
  Top Layer w8: TP2.1@-206.76,790.39 -210.07,787.08 -210.07,764.9 -238.44,736.52 -238.44,671.99 -344.24,566.2 -344.24,189.71 -152.02,-2.51 -152.02,-288.26 -150.52,-289.76 -150.52,-306.93 -149.45,-308 -149.45,-347.8 -96.66,-400.59 -96.66,-417.69 -118.4,-439.43 U12.13@-118.4,-441.95
  Top Layer w15: TP2.1@-206.76,790.39 -206.76,823.26 -179.1,850.92 R9.2@-148.2,850.92
PIO0: R32.1 U6.1 U12.30 | length 1907.5
  Top Layer w8: R32.1@-456.69,1150.59 -450.76,1144.65 -450.76,993.13 -486.69,957.2 -486.69,955.99 -489.58,953.1 U6.1@-494.5,953.1 -497.39,950.21 -504.02,950.21 -550.13,930.19 -560.04,920.28 -560.04,849.41 -472.72,762.09 -472.72,-320.19 -479.57,-327.04 -552.53,-400 -552.53,-479.96 -453.86,-578.62 U12.30@-453.86,-581.14
PIO1: R33.2 U6.3 U12.29 | length 1747.7
  Top Layer w8: U6.3@-489.58,901.91 U6.3@-494.5,901.91 -494.5,806.5 -456.72,768.71 -456.72,-326.82 -463.57,-333.67 -536.53,-406.63 -536.53,-470.54 -439.94,-567.13 U12.29@-439.94,-567.22 ; U6.3@-488.11,903.38 -482.88,908.61 -475.75,908.61 -455.46,928.91 -455.46,965.8 -401.51,1019.75 R33.2@-401.51,1048.23
PIO2: R34.1 U6.4 U12.28 | length 1842.3
  Top Layer w8: U12.28@-426.02,-553.3 -426.02,-550.92 -449.49,-527.45 -456.99,-527.45 -520.53,-463.91 -520.53,-413.25 -440.72,-333.44 -440.72,858.01 -412.74,885.98 -412.74,899.02 U6.4@-409.85,901.91 ; U6.4@-414.77,901.91 -421.48,908.62 -426.63,908.62 -433.66,915.65 -433.66,964.95 -341.54,1057.08 R34.1@-341.54,1150.59
PIO3: R35.2 U6.6 U12.27 | length 1772.7
  Top Layer w8: U12.27@-412.1,-539.38 -412.1,-536.87 -437.52,-511.45 -450.36,-511.45 -504.53,-457.29 -504.53,-419.88 -424.72,-340.07 -424.72,851.38 -386.04,890.05 -386.04,939.37 -393.07,946.4 -398.23,946.4 -404.93,953.09 U6.6@-409.85,953.09 -408.69,954.25 -408.69,967.3 -327.76,1048.23 R35.2@-287.36,1048.23
PIO4: R36.1 U7.1 U12.22 | length 1756.2
  Top Layer w8: U12.22@-342.51,-469.79 -342.51,-467.27 -408.72,-401.06 -408.72,-398.36 -408.72,760.54 -369.24,800.02 -369.24,937.71 -352.04,954.91 -305.31,954.91 U7.1@-304.14,953.74 -299.21,953.74 -296.32,956.63 -296.32,957.83 -228.06,1026.1 R36.1@-228.06,1151.57
PIO5: R37.2 U7.3 U12.21 | length 1645.8
  Top Layer w8: U12.21@-328.59,-455.87 -392.72,-391.74 -392.72,751.97 -392.24,752.45 -392.24,754.4 -304.13,842.5 U7.3@-304.13,902.56 ; U7.3@-299.21,902.56 -292.51,909.26 -282.67,909.26 -259.3,932.63 -259.3,972.23 -220.45,1011.08 -185.53,1011.08 -173.21,1023.4 R37.2@-173.21,1048.23
PIO6: R38.1 U7.4 U12.20 | length 1781.3
  Top Layer w8: U12.20@-314.67,-441.95 -376.24,-380.38 -376.24,747.77 -227.3,896.71 -227.3,899.67 U7.4@-224.41,902.56 ; R38.1@-113.94,1151.57 -113.94,1052.1 -170.96,995.08 -213.82,995.08 -243.3,965.6 -243.3,916.29 -236.27,909.26 -231.11,909.26 U7.4@-224.41,902.56 ; U7.4@-224.41,902.56 U7.4@-219.49,902.56 U7.4@-224.41,902.56
PIO7: R39.2 U7.6 U12.19 | length 1705.7
  Top Layer w8: U12.19@-300.75,-428.03 -303.27,-428.03 -325.01,-406.28 -327.7,-406.28 -360.24,-373.75 -360.24,741.14 -217.71,883.67 -202.71,883.67 -194.16,892.21 -194.16,938.5 -202.71,947.04 -207.87,947.04 U7.6@-214.57,953.74 ; U7.6@-219.49,953.74 -218.33,954.9 -218.33,967.94 -207.19,979.08 -164.33,979.08 -95.18,1048.23 R39.2@-59.06,1048.23
SHLD: C13.2 J2.6 J2.7 R42.2 U5.2
SW: C22.1 C23.1 L2.2 L3.2 U10.5 | length 311.9
  Top Layer w15: L2.2@567.91,-1322.83 569.88,-1324.8 597.72,-1324.8 608.7,-1335.78 613.87,-1335.78 622.66,-1344.56 622.66,-1346.67 631.3,-1355.31 C22.1@634.84,-1355.31 591.86,-1355.31 568.9,-1378.27 U10.5@568.9,-1412.4 ; C22.1@633.17,-1355.31 686.02,-1355.31 692.92,-1348.42 692.92,-1290.35
UART_0_RX: U12.35 U15.7 | length 848.9
  Top Layer w8: v1(-649.1,-1288.8) -669.93,-1267.97 -669.93,-1157.41 -756.89,-1070.45 -756.89,-1000.9 -640.83,-884.84 -589.14,-884.84 U12.35@-453.86,-749.57
  Bottom Layer w8: v1(-649.1,-1288.8) -646.55,-1291.35 U15.7@-646.55,-1396.95
UART_0_TX: U12.34 U15.2 | length 1365.1
  Top Layer w8: U15.2@-946.46,-1474.02 -1042.12,-1474.02 -1120.28,-1395.85 -1120.28,-1092.48 -984.3,-956.5 -929.41,-956.5 -875.42,-902.52 -830.15,-902.52 -763.82,-836.19 -763.82,-819.58 v1(-760.51,-816.26) ; v1(-715.74,-866.95) -599.08,-866.95 U12.34@-467.78,-735.65
  Bottom Layer w8: v1(-760.51,-816.26) -760.51,-819.22 -715.74,-863.99 v1(-715.74,-866.95)
USB_N: R40.2 U5.4 U12.56 | length 517
  Top Layer w8: U12.56@-62.73,-833.08 -9.6,-886.21 cw(c-80.32,-956.92) 19.68,-956.92 19.68,-1131.89 cw(c-51.6,-1131.89) -1.19,-1182.3 U5.4@-10.83,-1191.93 -30.8,-1191.93 ccw(c-0.59,-1222.14) -43.31,-1222.14 R40.2@-43.31,-1287.4
USB_P: R41.2 U5.6 U12.57 | length 513.3
  Top Layer w8: U12.57@-48.81,-819.16 -22.4,-845.57 -13.88,-854.09 cw(c-19.54,-859.74) -13.43,-854.57 16.86,-890.05 cw(c10.77,-895.25) 17.39,-890.75 cw(c-80.32,-956.92) 23.96,-901.68 30.41,-913.86 cw(c23.34,-917.6) 31.12,-915.72 34.36,-929.12 cw(c-80.32,-956.92) 37.68,-956.92 37.68,-1131.89 cw(c-51.6,-1131.89) 14.37,-1192.06 13.9,-1192.95 ccw(c20.98,-1196.67) 12.98,-1196.63 12.98,-1224.41 cw(c0.98,-1224.41) 3.58,-1236.12 ccw(c5.34,-1243.93) 1.72,-1236.79 -5.09,-1240.22 U5.6@-10.83,-1243.11 -10.83,-1261.5 ccw(c16.06,-1261.5) -2.95,-1280.51
VBUS: F1.1 J2.1 | length 149.7
  Top Layer w20: F1.1@-104.33,-1337.6 -104.33,-1365.16 -85.92,-1383.57 ; -87.88,-1383.57 -85.92,-1383.57 ; J2.1@-55.12,-1453.74 -55.12,-1395.29 -66.83,-1383.57 -85.92,-1383.57
VREF: C12.1 FB2.2 R30.2 TP8.1 U4.6 U4.7 | length 1729.6
  Top Layer w8: R30.2@427.59,-159.83 427.59,-99.97 438.98,-88.58 553.15,-88.58 622.05,-157.48 622.05,-201.4 617.36,-206.09 U4.6@584.09,-206.09 ; v1(428,-334.97) 455.34,-307.63 455.34,-243.77 493.02,-206.09 U4.6@564.4,-206.09 ; v1(428.15,-471.65) 423.65,-476.14 423.65,-485.79 309.12,-600.33 261.97,-600.33 C12.1@259.46,-597.82 256.96,-595.32 223.27,-595.32 FB2.2@199.67,-571.72 196.99,-574.41 196.99,-596.59 239.17,-638.78 300.87,-638.78 v1(467.39,-472.25) ; v1(469.49,-334.97) 469.49,-333.3 484.25,-318.54 484.25,-262.95 515.52,-231.68 U4.7@564.4,-231.68
  Bottom Layer w8: v1(428,-334.97) 428.15,-335.12 v1(428.15,-471.65) ; v1(467.39,-472.25) 464.11,-468.97 464.11,-351.41 464.99,-350.52 464.99,-339.47 v1(469.49,-334.97)
VREF/2: R6.1 R11_1.1 R11_2.1 R13.1 R20.1 R26.1 R28.2 TP7.1 U3.1 U12.4 U12.6 U12.10 U12.16 | length 5501.6
  Top Layer w8: v1(-179.76,-129.03) -179.76,-135.39 -168.02,-147.14 -168.02,-275.3 -191.3,-298.59 -191.3,-415.23 -191.62,-415.55 -191.62,-419.45 ; v1(-169.44,812.61) -166.84,810.01 -147.64,810.01 -135.89,798.27 R13.1@-135.89,795.31 -135.89,794.06 -147.64,782.31 -170.39,782.31 -175.07,777.63 -175.07,777.27 -206.54,745.8 -206.54,714 -180.9,688.36 -148.35,688.36 -136.61,676.61 R26.1@-136.61,674.98 ; U12.16@-160.16,-400.19 -162.86,-400.19 -182.12,-419.45 -191.62,-419.45 ; v1(-108.27,-126.24) -101.91,-126.24 -92.07,-136.08 -90.83,-136.08 -90.17,-136.74 TP7.1@216.36,-136.74 253.39,-173.76 260.42,-180.79 260.42,-232.97 288.88,-261.44 288.88,-293.89 R28.2@324.07,-329.07 ; -100.9,-505.45 -127.69,-505.45 -144.24,-488.9 -187.47,-488.9 -203.73,-472.64 -203.73,-431.56 -191.62,-419.45 ; -99.65,-506.71 U12.10@-76.65,-483.71 ; -98.39,-507.97 -98.39,-534.75 -69.49,-563.64 -42.71,-563.64 ; U12.4@6.87,-567.22 4.35,-567.22 -17.39,-588.96 -38.02,-588.96 -42.71,-584.28 -42.71,-563.64 ; R6.1@312.93,674.25 R20.1@312.93,796.79 ; R20.1@312.93,797.28 R20.1@312.93,796.79 ; U3.1@321.25,-273.36 324.07,-276.18 R28.2@324.07,-329.07 ; R28.2@324.07,-332.02 R28.2@324.07,-329.07 ; v1(358.01,818.43) 351.66,818.43 343.63,810.41 324.67,810.41 312.93,798.66 312.93,794.33 R20.1@312.93,796.79 ; v1(413.51,821.71) 416.77,818.44 416.77,800.3 464.93,752.14 624.02,752.14 ; v1(491.86,-397.47) 487.07,-397.47 475.42,-385.83 187.03,-385.83 57.3,-515.56 5.37,-515.56 -18.45,-539.38 U12.6@-20.97,-539.38 -20.97,-541.9 -42.71,-563.64 ; v1(506.89,-472.25) 734.01,-472.25 874.52,-331.74 874.52,616.6 738.98,752.14 682.8,752.14 ; R11_1.1@623.03,785.35 623.03,753.13 624.02,752.14 ; R11_2.1@682.09,785.35 682.09,752.85 682.8,752.14 ; 624.02,752.14 682.8,752.14
  Top Layer w10: v1(-240.83,819.02) -177.16,882.69 -177.16,922.56 -163.14,936.58 v1(-3.97,936.58) ; v1(181.01,938.98) 182.2,937.79 225.15,937.79 226.34,938.98 357.28,938.98 416.48,879.78 416.48,824.68 v1(413.51,821.71)
  Bottom Layer w8: v1(-179.76,-129.03) -178.37,-127.63 -109.66,-127.63 v1(-108.27,-126.24) ; v1(358.01,818.43) 361.29,821.71 v1(413.51,821.71) ; v1(491.86,-397.47) 491.86,-455.82 506.89,-470.85 v1(506.89,-472.25)
  Bottom Layer w10: v1(-240.83,819.02) -237.63,815.81 -172.64,815.81 v1(-169.44,812.61) ; v1(-3.97,936.58) -2.77,937.78 179.81,937.78 v1(181.01,938.98)
VSUP: C15.2 C20.1 C21.1 C28.1 C40.1 FB1.2 FB3.1 J1.3 L2.1 L3.1 TP10.1 U9.1 U9.3 U10.6 U10.7 U13.1 | length 5891
  Top Layer w15: U9.1@-863.19,-1056.1 -857.89,-1050.81 -838.93,-1050.81 -818.29,-1030.17 -818.29,-1018.48 -809.65,-1009.84 -829.19,-990.3 -831.26,-990.3 -834.97,-986.59 -857.89,-986.59 U9.3@-863.19,-981.3 ; 438.19,-1483.97 477.36,-1483.97 489.32,-1472.01 489.32,-1469.93 508.86,-1450.39 525,-1466.54 U10.7@568.9,-1466.54 ; C15.2@508.86,-1446.85 C15.2@508.86,-1443.68 ; U10.6@568.9,-1440.95 539.37,-1440.95 538.71,-1440.29 538.45,-1440.29 535.31,-1437.15 515.39,-1437.15 C15.2@508.86,-1443.68 ; L3.1@704.73,-1203.74 700.05,-1199.07 537.87,-1199.07 520.42,-1216.52 520.42,-1242.64 481.3,-1281.76 L2.1@481.3,-1322.83 508.86,-1350.39 C15.2@508.86,-1443.68
  Top Layer w20: U13.1@-806.1,-1290.35 -805.12,-1291.34 -748.03,-1291.34 C40.1@-747.05,-1292.32 -691.93,-1292.32 -691.93,-1166.52 -779.51,-1078.95 -779.51,-1032.89 C28.1@-802.56,-1009.84 ; C28.1@-806.1,-1009.84 C28.1@-802.56,-1009.84 ; v1(-743.67,-894.88) -742.52,-896.03 -742.52,-955.41 -779.91,-992.8 -785.52,-992.8 C28.1@-802.56,-1009.84 ; -690.36,-1295.28 -663.08,-1322.55 -625.14,-1322.55 -624.86,-1322.83 -616.14,-1322.83 -468.07,-1470.91 TP10.1@-468.07,-1531.93 -466.01,-1533.99 -466.01,-1560.13 -438.01,-1588.13 -286.62,-1588.13 -264.25,-1565.77 C21.1@-250.63,-1552.15 ; FB1.2@-324.8,-1537.4 C21.1@-251.63,-1537.4 ; C21.1@-250.63,-1536.4 C21.1@-250.63,-1552.15 ; 438.19,-1483.97 406.78,-1483.97 335.05,-1555.7 335.05,-1585.57 323.34,-1597.28 -205.5,-1597.28 C21.1@-250.63,-1552.15
  Top Layer w40: v3@-807.71,-826.93 -807.71,428.29 -777.34,458.66 ; J1.3@-700,1277.95 -777.34,1200.61 -777.34,458.66 ; v3(-508.34,458.66) -777.34,458.66 ; v3(-292.61,456.69) FB3.1@-20.67,456.69
  Bottom Layer w20: v3(-806.32,-828.31) -745.87,-888.77 -745.87,-892.68 v1(-743.67,-894.88)
  Bottom Layer w40: v3(-508.34,458.66) -507.35,457.68 -293.6,457.68 v3(-292.61,456.69)
VSUPA: C1.2 C43.1 FB3.2 U1.4 | length 534.5
  Top Layer w12: FB3.2@-20.67,531.5 FB3.2@-16.17,535.99 ; U1.4@-18.77,751.02 -68.44,751.02 -69.74,749.72 -73.28,749.72 -85.42,737.58 C1.2@-85.42,734.04 -78.75,727.36 11.09,727.36 30.68,746.95 v2(32.03,746.95) ; C43.1@45.7,535.99 C43.1@47.24,534.45
  Top Layer w20: FB3.2@-16.17,535.99 C43.1@45.7,535.99 ; C43.1@47.24,534.45 47.24,661.06 v2(88.52,702.33)
  Bottom Layer w12: v2(32.03,746.95) v2@37.96,746.95 ; v2@82.58,702.33 v2(88.52,702.33)
  Bottom Layer w20: v2@37.96,746.95 v2@82.58,702.33
WIFI_EN: U12.15 U13.3 | length 1344.3
  Top Layer w8: v1(-813.26,-1069.33) -813.26,-1075.69 -805.13,-1083.82 -805.13,-1084.44 -750.17,-1139.4 -733.91,-1155.65 -733.91,-1178.64 -762.03,-1206.76 -797.31,-1206.76 U13.3@-806.1,-1215.55 ; v2(-729.14,-1058.96) -729.14,-995.78 -634.21,-900.84 -565.9,-900.84 v1(-520.74,-855.69) ; v1(-571.22,-799.84) -571.22,-760.6 -496.68,-686.07 -400.9,-686.07 -240.16,-525.33 v2(-240.16,-521.65) ; v2(-175.98,-460.88) -171.48,-456.38 -171.48,-441.87 -146.24,-416.63 U12.15@-146.24,-414.11
  Bottom Layer w8: v1(-813.26,-1069.33) -745.87,-1069.33 -735.5,-1058.96 v2(-729.14,-1058.96) ; v1(-571.22,-799.84) -571.22,-805.2 v1(-520.74,-855.69) ; v2(-240.16,-521.65) -238.45,-521.65 -177.68,-460.88 v2(-175.98,-460.88)
pads on no net: J2.4 J3.7 U4.4 U4.5 U5.1 U5.3 U5.5 U6.5 U7.5 U8.4 U8.5 U9.4 U11.4 U11.8 U12.11 U12.14 U12.26 U12.36 U12.37 U12.38 U12.40 U12.41 U12.42 U12.43 U12.44 U12.48 U12.50 U12.52 U12.55 U13.4 U15.3 U15.5

## Polygon pours and split planes (outlines as drawn)
SHLD on Top Layer "SHLD_L01_P000" (solid, remove dead copper, pour order 0): -200,-1384.25 -200,-1606.9 331.73,-1606.9 333.66,-1604.97 333.66,-1461.61 226.38,-1461.61 176.18,-1411.42 176.18,-1208.66 165.35,-1197.84 56.3,-1197.84 56.3,-1380.43 52.47,-1384.25
AGND on Top Layer "AGND_L01_P002" (solid, remove dead copper, pour order 2): 1084.83,486.94 410.27,487.37 350.19,487.41 351.38,428.15 -232.28,428.15 -232.28,879.38 -137.03,974.63 -50.07,978.45 -50.07,1427.17 1084.83,1427.17
GND on Top Layer "GND_L01_P008" (solid, remove dead copper, pour order 8): -1145.67,1629.92 -1141.73,1625.98 -1141.73,-1625.98 1082.68,-1625.98 1082.68,1625.98
3V3 on Top Layer "3V3_L01_P006" (solid, remove dead copper, pour order 6): -216.54,-292.31 -290.35,-366.13 -290.35,-368.11 -244.09,-414.37 -466.39,-636.66 -466.39,-643.96 -516.68,-593.67 -588.36,-665.35 -589.58,-665.35 -511.02,-743.91 -466.54,-699.42 -466.54,-692.91 -460.23,-692.91 -237.93,-915.21 -291.23,-968.5 -291.34,-968.5 -291.34,-971.56 -220.42,-1042.48 -140.29,-962.36 -140.99,-962.36 -187.99,-915.35 34.01,-693.35 34.01,-693.19 34.02,-693.19 79.56,-738.74 154.66,-663.63 154.66,-663.51 153.45,-663.51 83.61,-593.67 33.32,-643.96 33.32,-640.48 -191.62,-415.55 -143.77,-367.71 -143.77,-366.29
GND on Top Layer "Top Layer-GND" (solid, remove dead copper, pour order 9): 243 vertices, not listed, extent -128.44,-1345.34 84.19,-753.45
AGND on Bottom Layer "AGND_L02_P001" (solid, remove dead copper, pour order 1): 1084.83,486.94 410.27,487.37 350.19,487.41 351.38,428.15 -232.28,428.15 -232.28,879.38 -137.03,974.63 -50.07,978.45 -50.07,1427.17 1084.83,1427.17
GND on Bottom Layer "GND_L02_P007" (solid, remove dead copper, pour order 7): -1145.67,1629.92 -1145.67,-1625.98 1082.68,-1625.98 1082.68,1625.98

## Keep-outs
Keep-Out Layer:
  lines w8: 133.86,-850.39 54.73,-929.52 54.73,-932.89 54.73,-1001.79 141.35,-1088.4 164.97,-1088.4 432.69,-820.69 432.69,-804.94 353.95,-726.2 263.39,-726.2 259.46,-726.2 182.51,-803.15
  lines w10: -576.22,-474.41 -576.22,-433.83 -605.26,-404.79 -634.79,-404.79 -704.38,-404.79 -711.34,-411.75 -732.22,-432.63 -732.22,-627.5 -711.34,-648.38 -613.91,-648.38 -577.18,-611.65 -577.18,-590.96 -576.54,-590.96 -561.17,-575.59

## Other copper
Top Layer:
  pour cut-out: -28.99,-1257.55 -28.99,-1261.53 -26.18,-1261.53 -25.1,-1261.75 -25.15,-1261.5 -25.15,-1259.49 -26.46,-1259.23
  pour cut-out: -25.4,-1208.26 -28.09,-1214.77 -29.03,-1221.91 -28.99,-1222.14 -28.99,-1228.68 -26.46,-1226.99 -22.64,-1226.23 -9.14,-1226.23 -4.71,-1224 -3.14,-1223.56 -3.12,-1223.55 -3.02,-1223.5 -2.94,-1223.42 -1.34,-1222.76 -1.34,-1208.81 -22.64,-1208.81
  pour cut-out: 264 vertices and 0 holes, not listed, extent -96.38,-1313.27 52.13,-785.51

## Silkscreen, mask and mechanical layers (free items; w line width, h text height)
Top Solder:
  circle w118.11: c-580.75,1063.23 r59.06
  circle w118.11: c521.61,1063.23 r59.06
  circle w118.11: c521.61,-1062.76 r59.06
  circle w118.11: c-580.75,-1062.76 r59.06
Bottom Solder:
  circle w118.11: c-580.75,1063.23 r59.06
  circle w118.11: c521.61,1063.23 r59.06
  circle w118.11: c521.61,-1062.76 r59.06
  circle w118.11: c-580.75,-1062.76 r59.06
Board Shape:
  the board outline again, w19.68
Fab Notes:
  lines w10: 0,-1653.54 0,1574.8

## Text inside footprints (layer, text, board x,y; h text height)
D3: Top Overlay "K" at -128.82,-944.38 h19.68 r315